# EAGLE board VoltageRegulation (EAGLE 8.4.3)
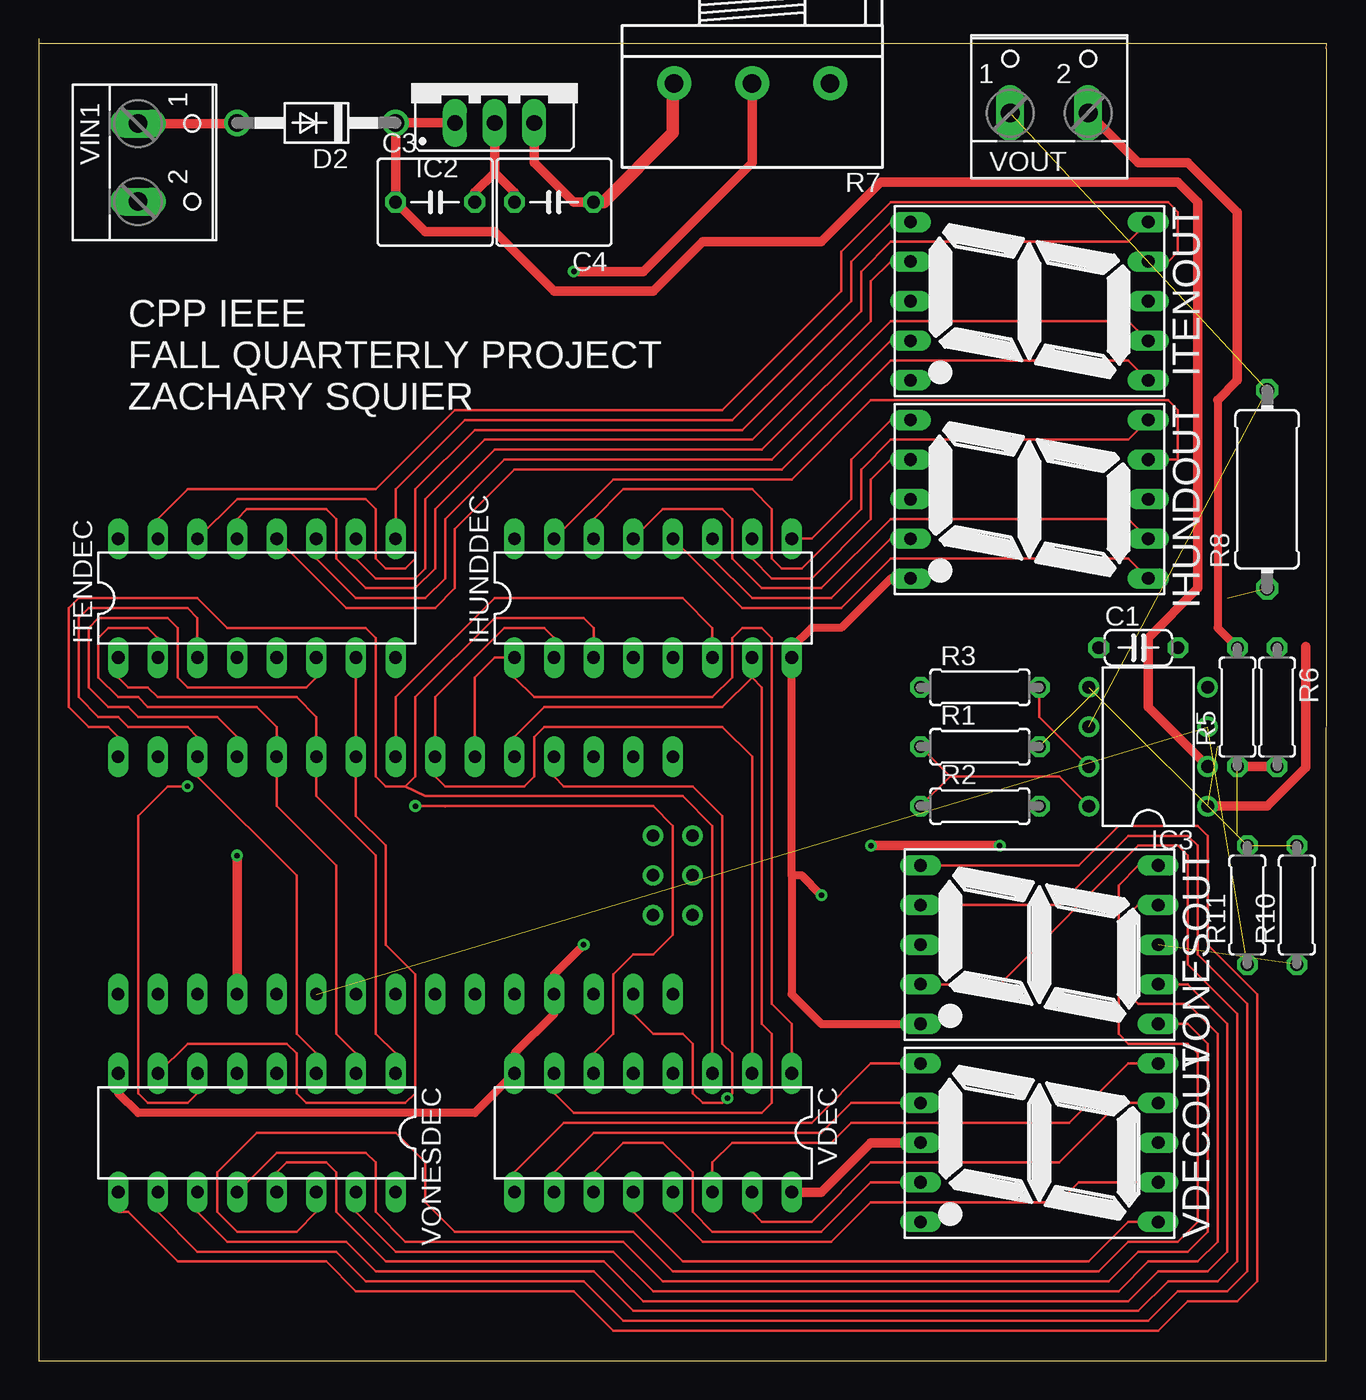
[diagram p0: board, top side]
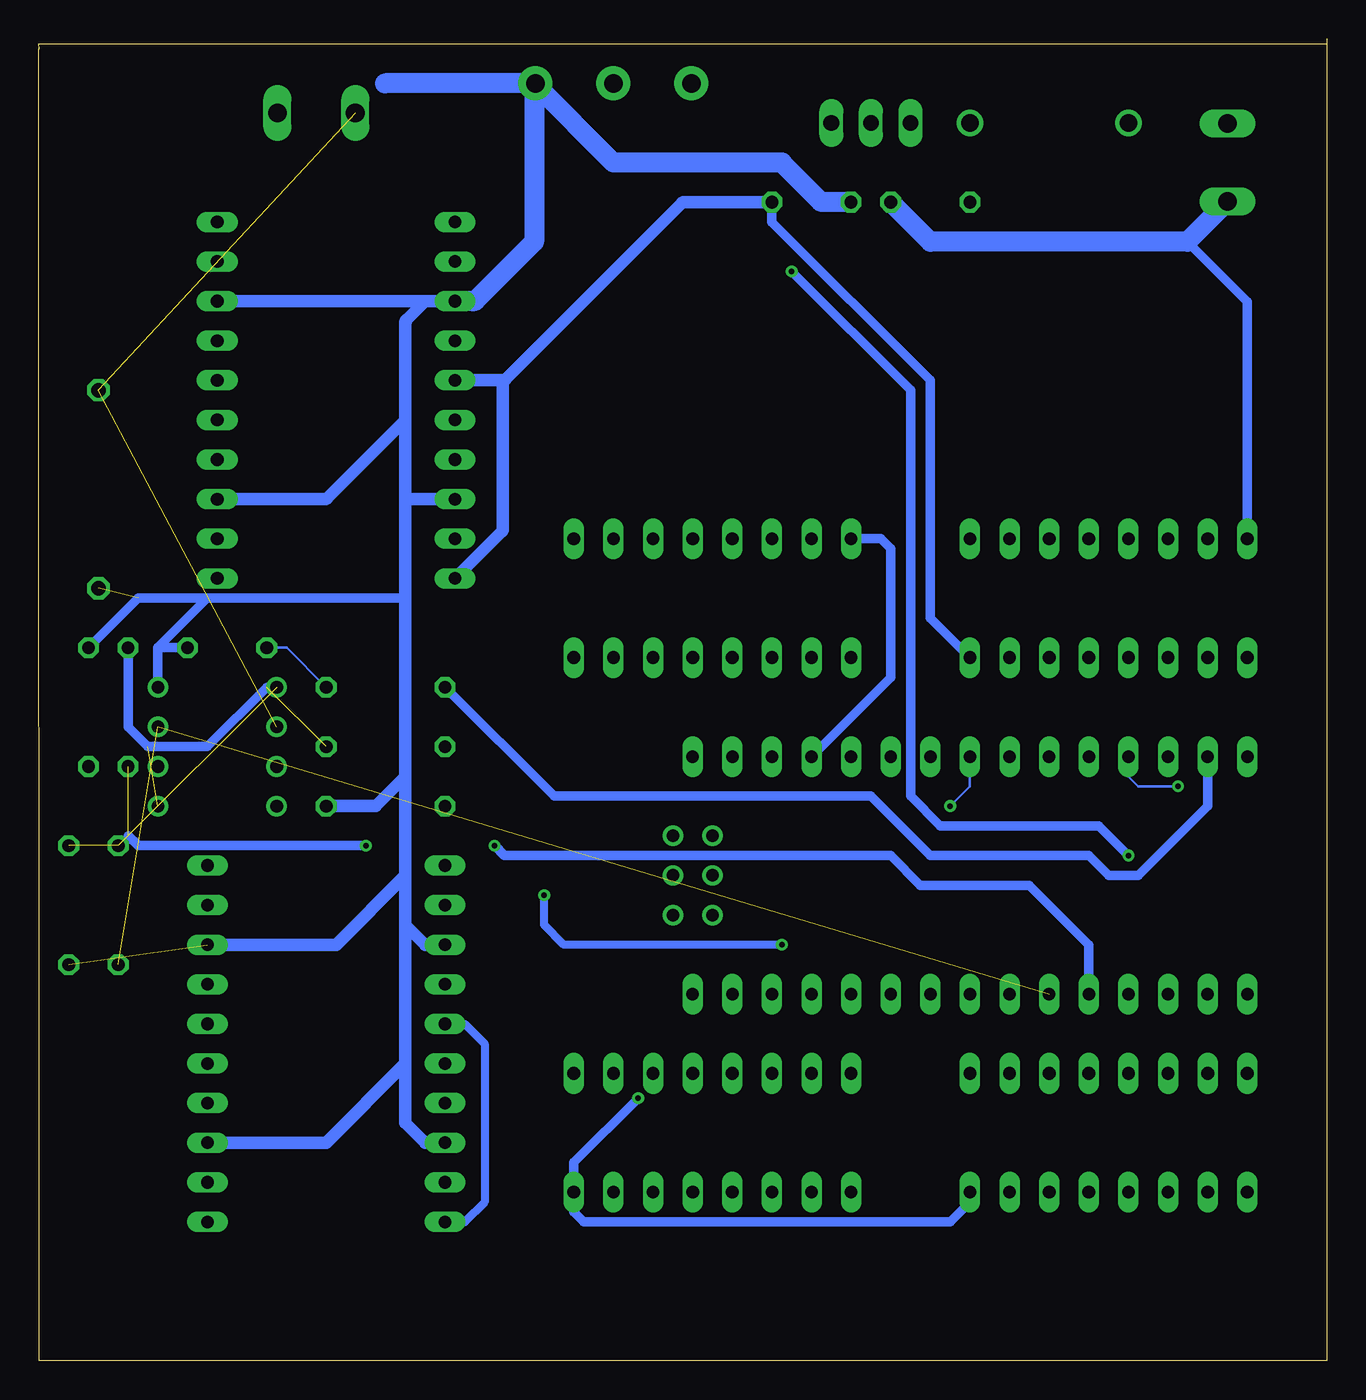
[diagram p1: board, bottom side, seen from below]

Size 82.55 x 84.76 mm. Coordinates in mm from the lower left corner, seen from the top.
Outline: 0,84.45 82.55,84.45 82.53,84.12 82.55,84.1 82.55,81.28 82.53,0 0,0 0,84.45
Outline: 0,84.76 0,84.45
Copper layers (1*16): Top 0.035mm / dielectric 1.5mm / Bottom 0.035mm
Design rules "VoltageRegulation": minimum track width 6mil, minimum drill 0.35mm, track to track 0.205mm, track to pad 0.205mm, pad to pad 0.205mm, via to via 0.205mm, smd to smd 6mil, copper to edge 40mil, drill to drill 6mil, minimum pad ring 10mil, minimum via ring 8mil, stop-mask expansion 4mil, vias tented up to drill 0mil, thermal gap 10mil
Net classes: 0 default: clearance 0.205 mm

## Footprints (pad centres in the part's own frame; a part is rotated, then mirrored left to right if it is on the bottom)
C050-024X044 = drill 0.813 octagon: 1 -2.54,0; 2 2.54,0
C050-055X075 = drill 0.813 octagon: 1 -2.54,0; 2 2.54,0
DO41-10 = drill 1.118: A 5.08,0; C -5.08,0
78XXS = drill 1.016 long: GND 0,-2.54; IN -2.54,-2.54; OUT 2.54,-2.54
DIL08 = drill 0.813 pad 1.27: 1 -3.81,-3.81; 2 -1.27,-3.81; 3 1.27,-3.81; 4 3.81,-3.81; 5 3.81,3.81; 6 1.27,3.81; 7 -1.27,3.81; 8 -3.81,3.81
DIL16 = drill 0.813 long: 1 -8.89,-3.81; 2 -6.35,-3.81; 3 -3.81,-3.81; 4 -1.27,-3.81; 5 1.27,-3.81; 6 3.81,-3.81; 7 6.35,-3.81; 8 8.89,-3.81; 9 8.89,3.81; 10 6.35,3.81; 11 3.81,3.81; 12 1.27,3.81; 13 -1.27,3.81; 14 -3.81,3.81; 15 -6.35,3.81; 16 -8.89,3.81
7SEG-13 = drill 0.813 long: 1 -5.08,-7.62; 2 -2.54,-7.62; 3 0,-7.62; 4 2.54,-7.62; 5 5.08,-7.62; 6 5.08,7.62; 7 2.54,7.62; 8 0,7.62; 9 -2.54,7.62; 10 -5.08,7.62
0207/7 = drill 0.813 octagon: 1 -3.81,0; 2 3.81,0
3RP/1610N = drill 1.2 pad 2.184: 1 -5,0; 2 0,0; 3 5,0
0411/12 = drill 0.914 octagon: 1 -6.35,0; 2 6.35,0
NANO = drill 0.8 long: 3.3V -10.16,24.13; 5V -10.16,-1.27; A0 -10.16,19.05; A1 -10.16,16.51; A2 -10.16,13.97; A3 -10.16,11.43; A4 -10.16,8.89; A5 -10.16,6.35; A6 -10.16,3.81; A7 -10.16,1.27; AREF -10.16,21.59; D2 5.08,1.27; D3 5.08,3.81; D4 5.08,6.35; D5 5.08,8.89; D6 5.08,11.43; D7 5.08,13.97; D8 5.08,16.51; D9 5.08,19.05; D10 5.08,21.59; D11 5.08,24.13; D12 5.08,26.67; D13 -10.16,26.67; GND -10.16,-6.35; GND1 5.08,-1.27; RAW -10.16,-8.89; RST -10.16,-3.81; RST1 5.08,-3.81; RX1 5.08,-6.35; TX0 5.08,-8.89 | drill 0.8: ICSP1 -5.08,-10.16; ICSP2 -5.08,-7.62; ICSP3 -2.54,-10.16; ICSP4 -2.54,-7.62; ICSP5 0,-10.16; ICSP6 0,-7.62
W237-102 = drill 1.194 long: 1 -2.5,-1.27; 2 2.5,-1.27

## Placement (x,y rotation side)
C1  [C050-024X044]  70.48,45.72 0 top
C3  [C050-055X075]  25.4,74.3 0 top
C4  [C050-055X075]  33.02,74.3 180 top
D2  1N4004  [DO41-10]  17.78,79.38 180 top
IC2  [78XXS]  29.21,81.91 0 top
IC3  L272M  [DIL08]  71.12,39.37 90 top
IHUNDDEC  4558N  [DIL16]  39.37,48.89 0 top
IHUNDOUT  [7SEG-13]  63.5,55.24 270 top
ITENDEC  4558N  [DIL16]  13.97,48.89 0 top
ITENOUT  [7SEG-13]  63.5,67.94 270 top
R1  30k  [0207/7]  60.32,39.37 0 top
R2  10k  [0207/7]  60.32,35.56 0 top
R3  10k  [0207/7]  60.32,43.18 0 top
R5  30k  [0207/7]  76.84,41.91 90 top
R6  30k  [0207/7]  79.38,41.91 270 top
R7  [3RP/1610N]  45.72,81.91 180 top
R8  0.02  [0411/12]  78.74,55.88 90 top
R10  200  [0207/7]  80.65,29.21 90 top
R11  100k  [0207/7]  77.47,29.21 90 top
U$1  NANO  [NANO]  31.75,33.66 90 top
VDEC  4558N  [DIL16]  39.37,14.61 180 top
VDECOUT  [7SEG-13]  64.14,13.97 270 top
VIN1  [W237-102]  7.62,76.83 270 top
VONESDEC  4558N  [DIL16]  13.97,14.61 180 top
VONESOUT  [7SEG-13]  64.14,26.67 270 top
VOUT  [W237-102]  64.77,81.28 0 top

## Library data of the parts
C1 C3 C4 R2 R3 R8 = rcl
D2 = diode
IC2 = v-reg
IC3 = linear
IHUNDDEC ITENDEC VDEC VONESDEC = 45xx
IHUNDOUT ITENOUT VDECOUT VONESOUT = special
R1 R5 R6 R10 R11 = rcl; R: 30000
R7 = pot
U$1 = Arduino-clone
VIN1 VOUT = con-wago-500; MPN: 237-102; OC_FARNELL: unknown; OC_NEWARK: 70K9898

## Nets
1DIGITBUS1: VONESDEC.13 VONESOUT.7
1DIGITBUS2: VONESDEC.12 VONESOUT.6
1DIGITBUS3: VONESDEC.11 VONESOUT.4
1DIGITBUS4: VONESDEC.10 VONESOUT.2
1DIGITBUS5: VONESDEC.9 VONESOUT.1
1DIGITBUS6: VONESDEC.15 VONESOUT.9
1DIGITBUS7: VONESDEC.14 VONESOUT.10
1SDIGIT1: ITENDEC.7 U$1.D6 VONESDEC.7
1SDIGIT2: ITENDEC.1 U$1.D7 VONESDEC.1
1SDIGIT3: ITENDEC.2 U$1.D8 VONESDEC.2
1SDIGIT4: ITENDEC.6 U$1.D9 VONESDEC.6
1SDIGIT5: ITENDEC.3 U$1.D10 VONESDEC.3
2DIGIT1: VDEC.13 VDECOUT.7
2DIGIT2: VDEC.12 VDECOUT.6
2DIGIT3: VDEC.11 VDECOUT.4
2DIGIT4: VDEC.10 VDECOUT.2
2DIGIT5: VDEC.9 VDECOUT.1
2DIGIT6: VDEC.15 VDECOUT.9
2DIGIT7: VDEC.14 VDECOUT.10
4DIGIT1: IHUNDDEC.13 IHUNDOUT.7
4DIGIT2: IHUNDDEC.12 IHUNDOUT.6
4DIGIT3: IHUNDDEC.11 IHUNDOUT.4
4DIGIT4: IHUNDDEC.10 IHUNDOUT.2
4DIGIT5: IHUNDDEC.9 IHUNDOUT.1
4DIGIT6: IHUNDDEC.15 IHUNDOUT.9
4DIGIT7: IHUNDDEC.14 IHUNDOUT.10
10SDIGIT1: IHUNDDEC.7 U$1.D2 VDEC.7
10SDIGIT2: IHUNDDEC.1 U$1.D3 VDEC.1
10SDIGIT3: IHUNDDEC.2 U$1.D4 VDEC.2
10SDIGIT4: IHUNDDEC.6 U$1.D5 VDEC.6
10SDIGIT5: IHUNDDEC.3 U$1.D12 VDEC.3
+5V: C4.1 IC2.OUT IHUNDDEC.8 IHUNDOUT.5 ITENDEC.8 ITENOUT.5 R7.3 U$1.5V VDEC.8 VDECOUT.5 VONESDEC.8 VONESOUT.5
+12V: C3.1 D2.C IC2.IN IC3.2
GND: C1.2 C3.2 C4.2 IC2.GND IC3.4 IHUNDDEC.16 IHUNDOUT.3 IHUNDOUT.8 ITENDEC.16 ITENOUT.3 ITENOUT.8 R2.2 R6.1 R7.1 R8.1 R10.1 U$1.GND U$1.GND1 VDEC.16 VDECOUT.3 VDECOUT.8 VIN1.2 VONESDEC.16 VONESOUT.3 VONESOUT.8
ITENBUS1: ITENDEC.13 ITENOUT.7
ITENBUS2: ITENDEC.12 ITENOUT.6
ITENBUS3: ITENDEC.11 ITENOUT.4
ITENBUS4: ITENDEC.10 ITENOUT.2
ITENBUS5: ITENDEC.9 ITENOUT.1
ITENBUS6: ITENDEC.15 ITENOUT.9
ITENBUS7: ITENDEC.14 ITENOUT.10
N$1: R3.1 U$1.D11
N$2: IC3.6 R8.2 VOUT.1
N$3: D2.A VIN1.1
N$4: IC3.8 R1.1 R2.1
N$5: C1.1 IC3.7 R3.2
N$6: IC3.1 R1.2 R5.2 VOUT.2
N$9: R7.2 U$1.A0
N$10: IC3.3 R11.1 U$1.A2
N$13: IC3.5 R10.2 R11.2
N$14: R5.1 R6.2 U$1.A1

## Tracks (layer width: path | path; a pad name or v marks a point on that pad's centre or on a via)
1DIGITBUS1
  Top 0.152: VONESDEC.13 15.24,12.07 15.88,12.7 18.41,12.7 19.05,12.07 19.05,9.52 22.22,6.35 36.2,6.35 38.73,3.81 69.85,3.81 71.76,5.71 74.93,5.71 76.2,6.98 76.2,21.59 73.66,24.13 VONESOUT.7
1DIGITBUS2
  Top 0.152: VONESDEC.12 15.24,13.34 20.95,13.34 21.59,12.7 21.59,9.52 23.49,7.62 37.46,7.62 40.01,5.08 68.58,5.08 70.48,6.98 73.66,6.98 74.93,8.25 74.93,20.32 73.66,21.59 VONESOUT.6
1DIGITBUS3
  Top 0.152: VONESDEC.11 10.16,9.52 12.07,7.62 19.68,7.62 21.59,5.71 35.56,5.71 38.1,3.18 70.48,3.18 72.39,5.08 75.57,5.08 76.84,6.35 76.84,22.22 73.66,25.4 73.66,32.39 73.03,33.02 70.48,33.02 61.59,24.13 VONESOUT.4
1DIGITBUS4
  Top 0.152: VONESDEC.10 7.62,9.52 10.16,6.98 19.05,6.98 20.95,5.08 34.92,5.08 37.46,2.54 71.12,2.54 73.03,4.45 76.2,4.45 77.47,5.71 77.47,22.86 74.3,26.04 74.3,33.02 73.66,33.66 69.85,33.66 65.41,29.21 VONESOUT.2
1DIGITBUS5
  Top 0.152: VONESDEC.9 5.08,9.52 5.71,9.52 8.89,6.35 18.41,6.35 20.32,4.45 34.29,4.45 36.83,1.91 71.76,1.91 73.66,3.81 76.84,3.81 78.11,5.08 78.11,23.5 74.93,26.67 74.93,33.66 74.3,34.29 69.22,34.29 66.68,31.75 VONESOUT.1
1DIGITBUS6
  Top 0.152: VONESDEC.15 20.32,9.52 22.86,6.98 36.83,6.98 39.37,4.45 69.22,4.45 71.12,6.35 74.3,6.35 75.57,7.62 75.57,20.96 73.66,22.86 70.48,22.86 69.85,23.5 69.85,28.57 70.48,29.21 VONESOUT.9
1DIGITBUS7
  Top 0.152: VONESOUT.10 70.48,31.75 69.22,30.48 69.22,20.96 69.85,20.32 73.66,20.32 74.3,19.68 74.3,8.89 73.03,7.62 69.85,7.62 67.95,5.71 40.64,5.71 38.1,8.25 26.67,8.25 24.77,10.16 24.77,12.7 22.86,14.61 13.97,14.61 11.43,12.07 11.43,9.52 12.7,8.25 16.51,8.25 17.78,9.52 VONESDEC.14
1SDIGIT1
  Top 0.152: ITENDEC.7 U$1.D6 20.32,34.92 22.22,33.02 22.22,26.67 24.13,24.76 24.13,17.14 23.49,16.51 17.14,16.51 16.51,17.14 16.51,19.68 15.88,20.32 9.53,20.32 VONESDEC.7
1SDIGIT2
  Top 0.152: VONESDEC.1 22.86,19.68 21.59,20.96 21.59,32.39 17.78,36.19 U$1.D7 17.78,41.28 16.51,42.55 7.62,42.55 6.99,43.18 5.71,43.18 5.08,43.81 ITENDEC.1
1SDIGIT3
  Top 0.152: VONESDEC.2 20.32,19.68 19.05,20.96 19.05,31.75 15.24,35.56 U$1.D8 15.24,40.64 13.97,41.91 6.99,41.91 6.35,42.55 5.08,42.55 3.81,43.81 3.81,46.36 4.45,46.99 6.99,46.99 7.62,46.36 ITENDEC.2
1SDIGIT4  (via drill 0.35)
  Top 0.152: ITENDEC.6 17.78,43.81 17.14,43.18 9.53,43.18 8.89,43.81 8.89,46.99 8.25,47.62 3.81,47.62 3.17,46.99 3.17,43.18 4.45,41.91 5.71,41.91 6.35,41.28 11.43,41.28 12.7,40 U$1.D9 | VONESDEC.6 10.16,17.14 9.53,16.51 6.99,16.51 6.35,17.14 6.35,34.92 8.25,36.83 v9.53,36.83
  Bottom 0.152: v9.53,36.83 12.07,36.83 12.7,37.47 U$1.D9
1SDIGIT5
  Top 0.152: ITENDEC.3 10.16,47.62 9.53,48.26 3.17,48.26 2.54,47.62 2.54,42.55 3.81,41.28 5.08,41.28 5.71,40.64 9.53,40.64 10.16,40 U$1.D10 | U$1.D10 10.16,39.37 | VONESDEC.3 17.78,19.68 16.51,20.96 16.51,31.11 10.16,37.47 U$1.D10
2DIGIT1
  Top 0.152: VDEC.13 40.64,9.52 42.55,7.62 50.8,7.62 53.34,10.16 65.41,10.16 66.68,11.43 VDECOUT.7
2DIGIT2
  Top 0.152: VDEC.12 38.1,9.52 41.27,6.35 67.31,6.35 69.85,8.89 VDECOUT.6
2DIGIT3
  Top 0.152: VDEC.11 35.56,12.07 37.46,13.97 40.01,13.97 41.91,12.07 41.91,9.52 43.18,8.25 50.16,8.25 53.34,11.43 VDECOUT.4
2DIGIT4
  Top 0.152: VDEC.10 33.02,12.07 35.56,14.61 50.16,14.61 52.07,16.51 VDECOUT.2
2DIGIT5
  Top 0.152: VDEC.9 30.48,12.07 33.66,15.24 49.53,15.24 53.34,19.05 VDECOUT.1
2DIGIT6
  Top 0.152: VDEC.15 45.72,9.52 46.35,8.89 49.53,8.89 53.34,12.7 65.41,12.7 69.22,16.51 VDECOUT.9
2DIGIT7
  Top 0.152: VDEC.14 43.18,12.7 44.45,13.97 50.8,13.97 52.07,15.24 66.04,15.24 69.85,19.05 VDECOUT.10
4DIGIT1
  Top 0.152: IHUNDOUT.7 69.85,53.97 54.61,53.97 50.16,49.53 46.35,49.53 44.45,51.44 44.45,53.97 43.81,54.61 40.01,54.61 IHUNDDEC.13
4DIGIT2
  Top 0.152: IHUNDOUT.6 69.85,51.44 54.61,51.44 51.44,48.26 45.09,48.26 IHUNDDEC.12
4DIGIT3
  Top 0.152: IHUNDDEC.11 43.18,51.44 45.72,48.89 50.8,48.89 54.61,52.7 IHUNDOUT.4
4DIGIT4
  Top 0.152: IHUNDDEC.10 45.72,51.44 46.99,50.16 49.53,50.16 53.34,53.97 53.34,56.52 54.61,57.78 IHUNDOUT.2
4DIGIT5
  Top 0.152: IHUNDDEC.9 49.53,52.7 52.07,55.24 52.07,57.78 54.61,60.33 IHUNDOUT.1
4DIGIT6
  Top 0.152: IHUNDDEC.15 36.83,56.52 48.26,56.52 53.34,61.59 72.39,61.59 73.03,60.96 73.03,57.78 IHUNDOUT.9
4DIGIT7
  Top 0.152: IHUNDDEC.14 35.56,53.97 37.46,55.88 45.72,55.88 46.99,54.61 46.99,51.44 47.62,50.8 48.89,50.8 52.7,54.61 52.7,57.15 54.61,59.05 69.85,59.05 IHUNDOUT.10
10SDIGIT1
  Top 0.152: 45.72,43.81 IHUNDDEC.7 45.72,43.81 | 45.72,43.81 43.81,41.91 32.38,41.91 30.48,40 U$1.D2 | 45.72,43.81 46.35,43.18 46.35,21.59 46.99,20.96 46.99,16.51 46.35,15.88 34.29,15.88 33.02,17.14 VDEC.7
10SDIGIT2
  Top 0.152: U$1.D3 27.94,43.81 29.21,45.08 IHUNDDEC.1 30.48,43.81 31.75,42.55 43.18,42.55 44.45,43.81 44.45,46.36 45.09,46.99 46.35,46.99 46.99,46.36 46.99,22.86 48.26,21.59 VDEC.1
10SDIGIT3
  Top 0.152: IHUNDDEC.2 33.02,46.36 32.38,46.99 29.84,46.99 25.4,42.55 U$1.D4 25.4,37.47 26.04,36.83 31.11,36.83 31.75,37.47 31.75,40 32.38,40.64 43.81,40.64 45.72,38.73 VDEC.2
10SDIGIT4  (via drill 0.35)
  Top 0.152: IHUNDDEC.6 43.18,46.99 41.27,48.89 29.21,48.89 22.86,42.55 U$1.D5 | VDEC.6 35.56,19.68 36.83,20.96 36.83,24.76 38.1,26.04 39.37,26.04 40.64,27.3 40.64,34.29 39.37,35.56 26.01,35.56 | 26.01,35.56 26.04,35.53 | 26.01,35.56 v24.13,35.56
  Bottom 0.152: v24.13,35.56 22.86,36.83 U$1.D5
10SDIGIT5
  Top 0.152: IHUNDDEC.3 35.56,46.99 34.92,47.62 29.21,47.62 24.13,42.55 24.13,37.47 23.49,36.83 | 23.49,36.83 22.22,36.83 21.59,37.47 21.59,46.36 20.95,46.99 12.07,46.99 10.16,48.89 2.54,48.89 1.91,48.26 1.91,41.91 3.17,40.64 4.45,40.64 5.08,40 U$1.D12 | 43.18,19.68 VDEC.3 43.18,34.29 41.27,36.19 24.77,36.19 23.49,36.83
+5V  (via drill 0.35)
  Top 0.508: 48.26,31.11 IHUNDDEC.8 48.26,45.72 49.53,46.99 51.44,46.99 54.61,50.16 IHUNDOUT.5 | 48.26,31.11 48.26,23.5 50.16,21.59 VONESOUT.5 | VONESDEC.8 5.08,17.14 6.35,15.88 27.94,15.88 VDEC.8 30.48,19.68 33.02,22.22 U$1.5V 33.02,24.76 v34.92,26.67 | v50.16,29.85 48.89,31.11 48.26,31.11
  Top 0.61: IC2.OUT 31.75,76.83 34.29,74.3 C4.1
  Top 0.813: R7.3 R7.3 arc45 40.64,81.73 40.64,78.74 36.2,74.3 C4.1
  Bottom 0.508: v34.92,26.67 48.89,26.67 50.16,27.94 v50.16,29.85 | VONESOUT.5 55.24,21.59 53.98,20.32 53.98,10.16 55.24,8.89 VDECOUT.5
  Bottom 0.61: C4.1 35.56,73.02 25.4,62.86 25.4,47.62 ITENDEC.8
  Bottom 0.813: C4.1 41.17,74.3 arc-45 41.35,74.22 52.63,62.94 arc45 52.81,62.86 | 52.81,62.86 ITENOUT.5 | IHUNDOUT.5 52.88,53.16 arc-45 52.81,53.34 52.81,62.86
+12V
  Top 0.61: IC2.IN D2.C C3.1 24.77,72.39 29.21,72.39 33.02,68.58 39.37,68.58 42.55,71.75 50.16,71.75 53.98,75.56 73.03,75.56 74.3,74.3 74.3,49.53 71.12,46.36 71.12,41.91 IC3.2
GND  (via drill 0.35)  (2 unrouted)
  Top 0.152: U$1.GND1 33.02,37.47 33.66,36.83 41.91,36.83 43.81,34.92 43.81,20.32 44.45,19.68 44.45,17.14 v44.13,16.83 43.81,16.51 42.55,16.51 41.91,17.14 41.91,20.32 41.27,20.96 39.37,20.96 38.1,22.22 U$1.GND
  Top 0.61: 29.21,76.2 IC2.GND | C4.2 30.48,74.93 29.21,76.2 | C3.2 27.94,74.93 29.21,76.2 | VDECOUT.3 53.34,13.97 50.16,10.79 VDEC.16
  Bottom 0.61: IC3.4 74.93,45.72 | C1.2 74.93,45.72 | 71.76,48.89 59.05,48.89 | 74.93,45.72 71.76,48.89 | R6.1 76.2,48.89 71.76,48.89 | v44.13,16.83 48.26,12.7 VDEC.16 48.26,9.52 47.62,8.89 24.13,8.89 22.86,10.16 VONESDEC.16 | ITENDEC.16 5.08,67.91 8.93,71.75 | IHUNDDEC.16 28.57,52.7 27.94,52.07 27.94,43.81 U$1.GND1
  Bottom 0.813: ITENOUT.3 57.78,67.94 | 57.78,67.94 ITENOUT.8 | 57.78,67.94 58.98,66.75 arc-45 59.05,66.57 59.05,60.33 | 59.05,60.33 64.06,55.32 arc45 64.24,55.24 IHUNDOUT.8 | 59.05,55.24 IHUNDOUT.3 | 59.05,55.24 59.05,60.33 | VONESOUT.3 57.78,26.67 59.05,27.94 | 59.05,31.11 59.05,27.94 | 59.05,37.47 59.05,48.89 59.05,55.24 | 59.05,37.47 59.05,31.11 | VONESOUT.8 63.5,26.67 59.05,31.11 | VDECOUT.3 57.78,13.97 59.05,15.24 59.05,19.05 | 59.05,19.05 59.05,27.94 | VDECOUT.8 64.14,13.97 59.05,19.05 | R2.2 60.96,35.56 59.05,37.47
  Bottom 1.27: C4.2 32.28,74.3 arc45 32.46,74.37 34.92,76.83 45.72,76.83 50.66,81.78 arc45 R7.1 | R7.1 R7.1 arc-45 50.8,81.73 50.8,71.75 54.54,68.02 arc45 54.71,67.94 ITENOUT.3 | C3.2 25.4,71.75 8.93,71.75 VIN1.2 | R7.1 60.37,81.91
ITENBUS1
  Top 0.152: ITENOUT.7 69.85,66.67 54.61,66.67 46.35,58.42 29.21,58.42 25.4,54.61 25.4,50.8 24.13,49.53 20.95,49.53 19.05,51.44 19.05,53.97 18.41,54.61 13.34,54.61 12.7,53.97 ITENDEC.13
ITENBUS2
  Top 0.152: ITENOUT.6 69.85,64.13 54.61,64.13 47.62,57.15 30.48,57.15 26.67,53.34 26.67,49.53 25.4,48.26 19.68,48.26 ITENDEC.12
ITENBUS3
  Top 0.152: ITENDEC.11 17.78,51.44 20.32,48.89 24.77,48.89 26.04,50.16 26.04,53.97 29.84,57.78 46.99,57.78 54.61,65.41 ITENOUT.4
ITENBUS4
  Top 0.152: ITENDEC.10 20.32,51.44 21.59,50.16 24.13,50.16 24.77,50.8 24.77,55.24 28.57,59.05 45.72,59.05 53.34,66.67 53.34,69.21 54.61,70.48 ITENOUT.2
ITENBUS5
  Top 0.152: ITENDEC.9 22.86,55.88 27.3,60.33 44.45,60.33 52.07,67.94 52.07,70.48 54.61,73.02 ITENOUT.1
ITENBUS6
  Top 0.152: ITENDEC.15 7.62,53.97 9.53,55.88 21.59,55.88 26.67,60.96 43.81,60.96 51.44,68.58 51.44,71.12 54.61,74.3 72.39,74.3 73.03,73.66 73.03,71.12 72.39,70.48 ITENOUT.9
ITENBUS7
  Top 0.152: ITENDEC.14 12.7,55.24 20.95,55.24 21.59,54.61 21.59,51.44 22.22,50.8 23.49,50.8 24.13,51.44 24.13,55.88 27.94,59.69 45.09,59.69 52.7,67.31 52.7,69.85 54.61,71.75 69.85,71.75 ITENOUT.10
N$1
  Bottom 0.61: R3.1 49.53,36.19 29.21,36.19 25.4,32.39 15.24,32.39 13.97,31.11 12.07,31.11 7.62,35.56 U$1.D11
N$2  (2 unrouted)
N$3
  Top 0.61: VIN1.1 12.66,79.33 D2.A
N$4
  Top 0.152: IC3.8 65.41,37.47 58.42,37.47 | 58.42,37.47 R1.1 | R2.1 58.42,37.47
N$5
  Top 0.152: IC3.7 64.14,41.28 R3.2
  Bottom 0.152: C1.1 66.68,45.72 R3.2
N$6  (2 unrouted)
  Top 0.508: R5.2 75.57,46.99 75.57,61.59
  Top 0.61: VOUT.2 67.31,80.01 70.48,76.83 73.66,76.83 76.84,73.66 76.84,62.86 75.57,61.59 | IC3.1 78.74,35.56 81.21,38.03 81.21,45.79
  Bottom 0.61: R5.2 76.84,40.64 75.57,39.37 71.76,39.37 67.95,43.18
N$9  (via drill 0.35)
  Top 0.61: R7.2 45.72,76.83 38.73,69.85 v34.29,69.85 | v12.7,32.39 U$1.A0
  Bottom 0.61: v34.29,69.85 26.67,62.23 26.67,36.19 24.77,34.29 14.61,34.29 v12.7,32.39
N$10  (2 unrouted)
N$13  (2 unrouted)
N$14  (via drill 0.35)  (1 unrouted)
  Top 0.61: R6.2 R5.1 | v61.59,33.02 v53.34,33.02
  Bottom 0.61: U$1.A1 15.24,26.67 19.05,30.48 26.04,30.48 27.94,32.39 52.7,32.39 v53.34,33.02 | 76.84,33.66 76.2,33.02 v61.59,33.02

## Text on the board
tNames: CPP IEEE / FALL QUARTERLY PROJECT / ZACHARY SQUIER